# Altium PCB XXX — копия.PcbDoc (part 2 of 2)
Units mm, origin at the board's own origin, x right, y up, seen from the top; angles counter-clockwise.
Board outline 220 x 115 mm, 2 copper layers (Top Layer, Top, Bottom Layer, Bottom); 162 components, 124 nets, 635 pads, 86 vias.
Unrouted connection lines stored in the file: 138.
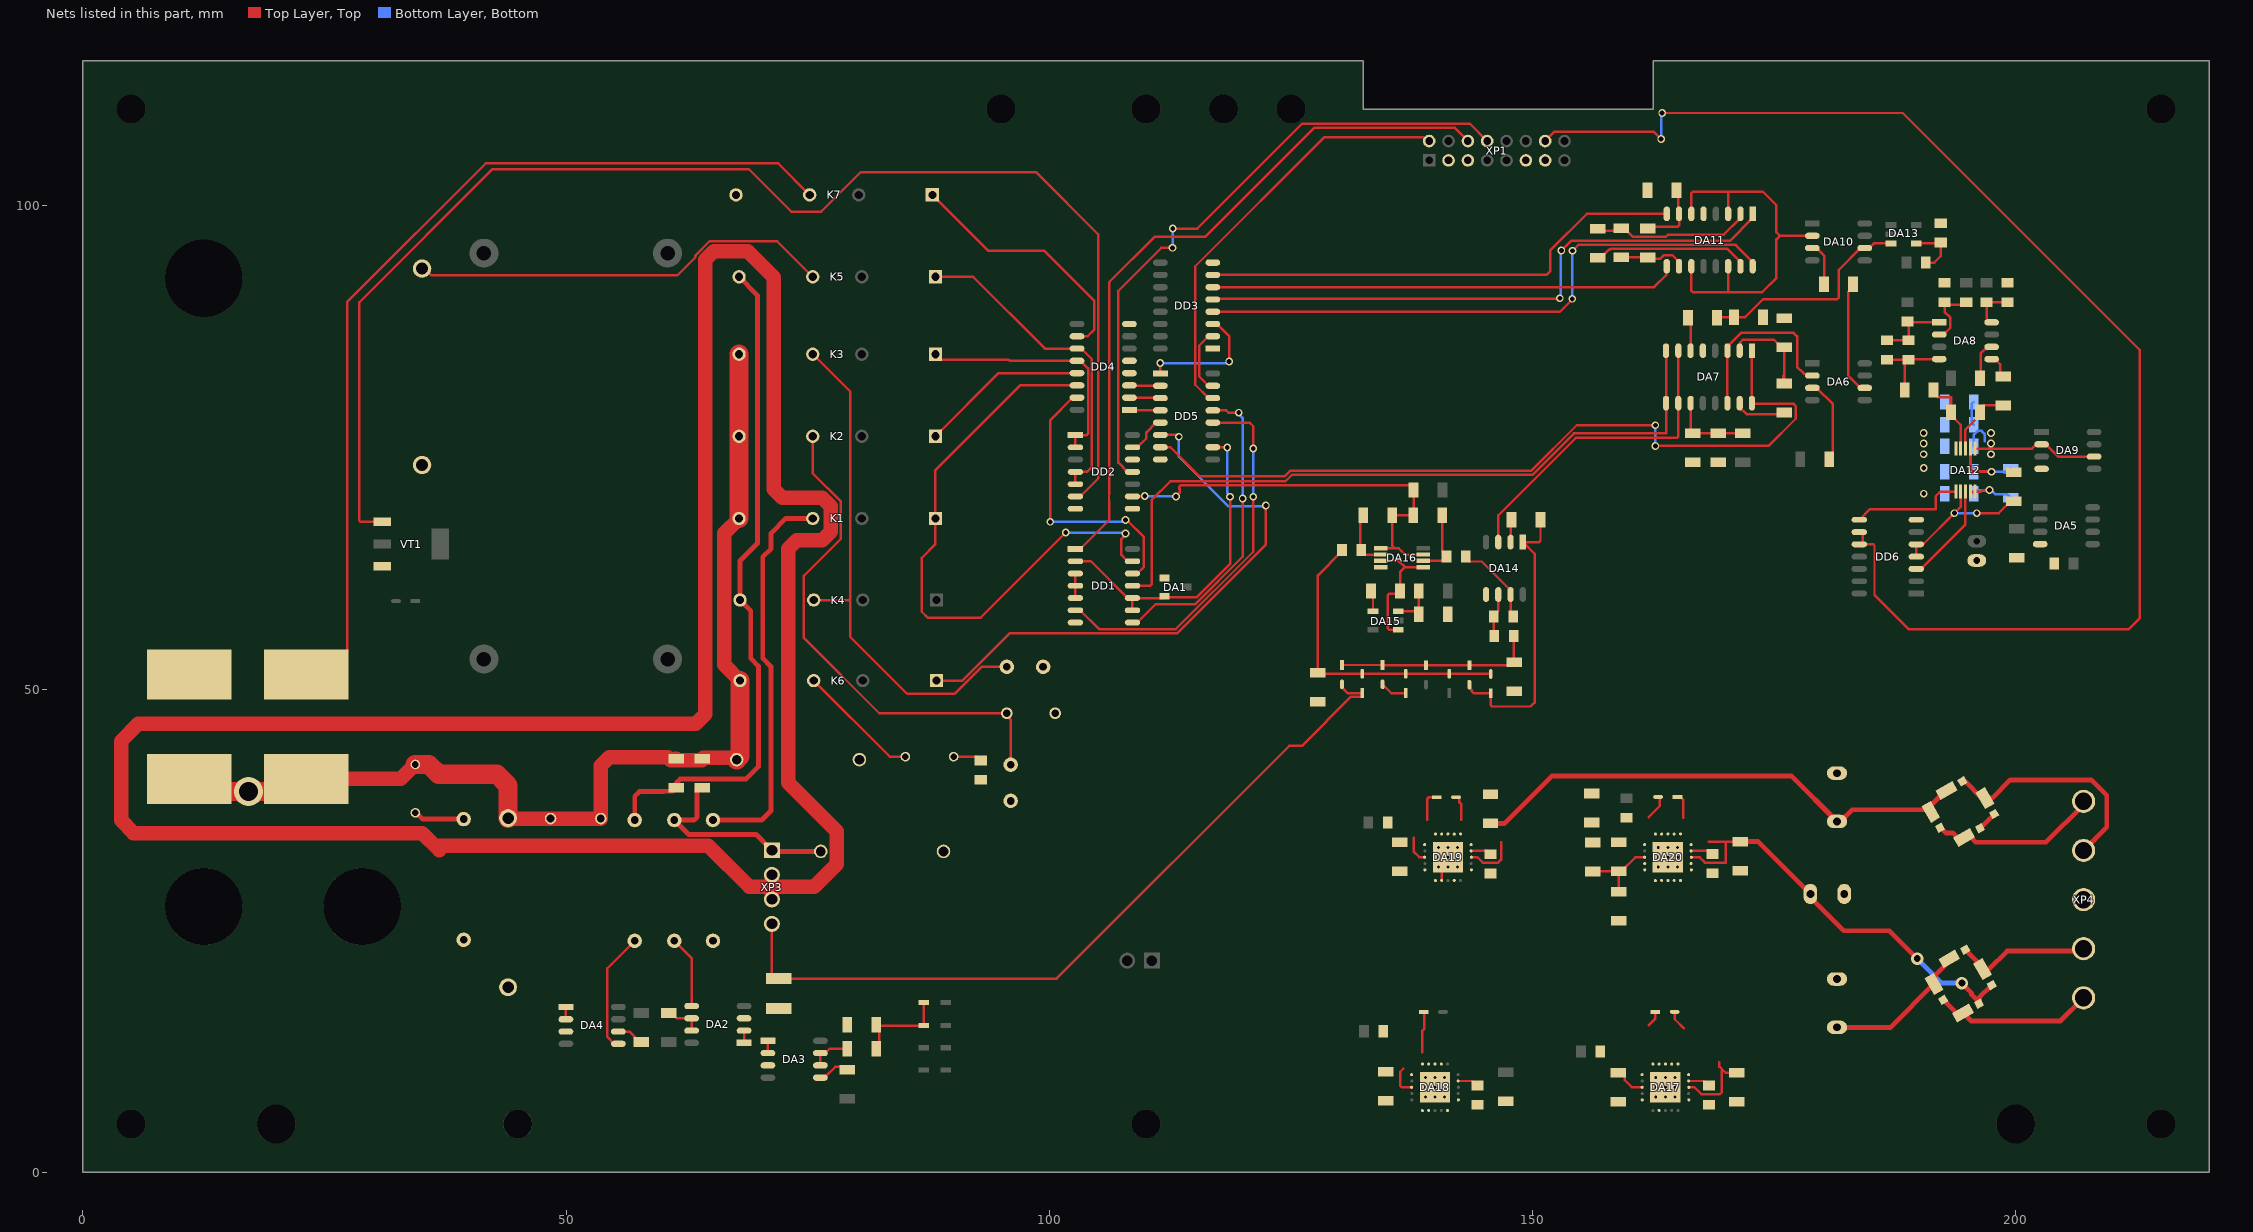
[diagram p2: the nets of this part, all layers, seen from the top]

## Via types
v1: diameter 0.8, hole 0.5, Top Layer, Top to Bottom Layer, Bottom, 48 vias
v2: diameter 0.6, hole 0.3, Top Layer, Top to Bottom Layer, Bottom, 36 vias
v3: diameter 1.27, hole 0.711, Top Layer, Top to Bottom Layer, Bottom, 2 vias

## Nets (pads, with @x,y where several pads share a name; then routed paths per layer and width w, separated by ;. In a path a pad name is that pad's centre, name@x,y a point inside that pad or via, vN(x,y) a via of type N, cw(c..) or ccw(c..) an arc to the next point about the centre after c; other vN are vias at no path point) (continued)
DAT_RgI: DD5.14 XP1.2 | length 44.5
  Top Layer, Top w0.254: DD5.14@116.912,80.105 116.475,80.105 115.1,81.479 115.1,93.742 128.458,107.1 138.628,107.1 139.028,106.7 XP1.2@139.3,106.7
DC1D1: DD3.2 DD5.15 | length 6.8
  Top Layer, Top w0.254: DD5.15@116.912,81.375 116.474,81.375 115.504,82.345 115.504,85.528 116.474,86.499 DD3.2@116.912,86.499
DC1D2: DD3.3 DD5.1 | length 13.1
  Top Layer, Top w0.254: v1(111.466,83.729) 111.488,83.707 DD5.1@111.488,82.645 ; DD3.3@116.912,87.768 117.349,87.768 118.6,86.518 v1(118.6,83.9)
  Bottom Layer, Bottom w0.254: v1(111.466,83.729) 118.429,83.729 v1(118.6,83.9)
DC2D1: DD4.1 DD5.4 | length 3.2
  Top Layer, Top w0.254: DD4.1@108.287,78.878 108.308,78.857 111.466,78.857 DD5.4@111.488,78.835
DC2D2: DD4.2 DD5.3 | length 3.2
  Top Layer, Top w0.254: DD4.2@108.287,80.148 108.308,80.127 111.466,80.127 DD5.3@111.488,80.105
DC2D3: DD4.3 DD5.2 | length 3.2
  Top Layer, Top w0.254: DD4.3@108.287,81.418 108.308,81.397 111.466,81.397 DD5.2@111.488,81.375
ENB_RgI: DD1.1 XP1.6 | length 73.7
  Top Layer, Top w0.254: DD1.1@102.7,64.497 103.2,64.497 106.2,67.497 106.2,69.43 106.173,69.457 106.173,70.143 106.2,70.17 106.2,74.806 106.183,74.823 106.183,77.426 106.2,77.443 106.2,92.1 110.914,96.814 116.157,96.814 127.424,108.081 141.919,108.081 XP1.6@143.3,106.7
GNDV: C1.1 C4.2 C5.1 C6.1 C7.2 C9.2 C10.2 C11.2 C13.1 C14.1 C15.2 C16.2 C17.2 C18.2 C19.1 C20.1 C21.1 C22.1 C23.1 C24.1 C25.1 C26.1 C27.1 C28.2 C29.1 C30.1 C32.1 DA1.1 DA2.3 DA3.3 DA4.3 DA5.4 DA7.5 DA8.6 DA9.4 DA11.5 DA12.5 DA14.5 DA16.4 DA17.5 DA17.7 DA17.11 DA17.17 DA17.18 DA17.19 DA17.21 DA18.6 DA18.7 DA18.10 DA18.11 DA18.17 DA18.18 DA18.19 DA18.21 DA19.5 DA19.6 DA19.7 DA19.9 DA19.11 DA19.17 DA19.18 DA19.19 DA19.21 DA20.4 DA20.5 DA20.6 DA20.7 DA20.8 DA20.9 DA20.10 DA20.11 DA20.12 DA20.17 DA20.18 DA20.19 DA20.21 DD1.7 DD2.7 DD3.1 DD3.8 DD4.4 DD4.5 DD4.8 DD5.8 DD6.7 FV1.1 FV2.1 K7.4 R1.1 R2.1 R5.1 R6.1 R7.1 R8.1 R9.1 R19.1 R22.1 R26.2 R27.1 R31.1 R37.1 R38.1 R42.1 R45.1 R47.2 R48.1 R57.1 VD19.2 VD21.2 VT1.3 XP1.3 XP1.5 XP1.11 XP1.13 XP4.3 | length 8.9
  Top Layer, Top w0.254: VT1.3@30.92,62.78 VT1.3@31,62.7 ; DA19.7@140.593,30.2 140.593,31.95 v2(141.243,32.6) ; C9.2@196.284,82.14 196.353,82.209 196.353,84.699 197.059,85.405 DA8.6@197.496,85.405 ; VD21.2@196.293,35.599 VD21.2@196.293,35.607 ; VD19.2@197.748,37.062 VD19.2@197.748,37.07
  Top Layer, Top w0.5: VD21.2@196.293,35.607 VD19.2@197.748,37.062
  other v1: 190.475,70.216 190.475,72.879 190.455,74.3 190.455,75.4 190.455,76.5
  other v2: 138.9,7.8 139.9,7.8 140.9,7.8 162.743,7.8 163.743,7.8 164.743,7.8 138.9,8.8 139.9,8.8 140.9,8.8 162.743,8.8 163.743,8.8 164.743,8.8 138.9,9.8 139.9,9.8 140.9,9.8 162.743,9.8 163.743,9.8 164.743,9.8 140.243,31.6 141.243,31.6 142.243,31.6 163,31.6 164,31.6 165,31.6 140.243,32.6 142.243,32.6 163,32.6 164,32.6 165,32.6 140.243,33.6 141.243,33.6 142.243,33.6 163,33.6 164,33.6 165,33.6
GRD: R18.2 VD8.1 VD13.2 XP3.2 XP3.3 | length 280.3
  Top Layer, Top w0.25: VD13.2@134.472,50.487 135.373,49.587 VD8.1@136.872,49.587
  Top Layer, Top w1.5: 5.2,35.1 5.29,35.1 ; 36.49,33.8 64.72,33.8 68.973,29.546 75.668,29.546 78,31.879 78,35.3 73,40.3 73,64.521 73.879,65.4 76.521,65.4 77.4,66.279 77.4,68.921 76.521,69.8 72.379,69.8 71.5,70.679 71.5,92.6 68.8,95.3 65.279,95.3 64.4,94.421 64.4,47.4 63.4,46.4 5.75,46.4 3.971,44.621 3.971,36.419 5.29,35.1 ; 36.9,33.321 35.121,35.1 5.29,35.1 ; XP3.3@71.3,28.24 XP3.2@71.3,30.78
I0: DD1.12 DD4.15 | length 29.3
  Top Layer, Top w0.254: v1(100.1,67.3) 100.1,77.823 102.425,80.148 DD4.15@102.863,80.148 ; v1(107.888,67.497) 108.003,67.497 109.781,65.719 109.781,62.638 109.1,61.957 DD1.12@108.6,61.957
  Bottom Layer, Bottom w0.254: v1(100.1,67.3) 107.543,67.3 107.74,67.497 v1(107.888,67.497)
K1: DD1.13 DD4.14 K1.1 | length 63
  Top Layer, Top w0.254: v1(101.7,66.2) 92.9,57.4 87.4,57.4 86.8,58 86.8,63.571 88.218,64.989 K1.1@88.218,67.65 88.218,72.663 96.973,81.419 DD4.14@103.513,81.419 ; v1(107.888,66.1) 107.888,65.952 107.419,65.483 107.419,63.908 108.1,63.227 DD1.13@108.6,63.227
  Bottom Layer, Bottom w0.254: v1(101.7,66.2) 101.75,66.15 107.838,66.15 v1(107.888,66.1)
K2: DD4.13 K2.1 | length 18
  Top Layer, Top w0.254: K2.1@88.218,76.15 94.757,82.688 DD4.13@103.513,82.688
K3: DD2.1 DD2.2 DD4.12 K3.1 | length 25.8
  Top Layer, Top w0.254: K3.1@88.218,84.65 88.782,84.086 95.773,84.086 95.901,83.958 DD4.12@102.863,83.958 103.233,83.958 104.006,83.185 104.006,76.427 103.857,76.279 DD2.1@102.7,76.279 DD2.2@102.7,75.009
K4: DD2.4 DD2.5 DD4.11 K5.1 | length 34
  Top Layer, Top w0.254: K5.1@88.218,92.65 92.127,92.65 99.548,85.229 DD4.11@102.863,85.229 103.3,85.229 104.41,84.118 104.41,72.998 103.881,72.469 DD2.4@102.7,72.469 DD2.5@102.7,71.199
K5: DD4.10 K7.1 | length 26.3
  Top Layer, Top w0.254: K7.1@87.9,101.128 93.671,95.358 99.45,95.358 104.657,90.15 104.657,87.205 103.951,86.498 DD4.10@102.863,86.498
KC: DD5.6 K6.1 | length 59.2
  Top Layer, Top w0.254: K6.1@88.317,50.878 91.007,50.878 95.921,55.792 113.251,55.792 122.4,64.941 v1(122.4,69) ; DD5.6@111.488,76.295 113.057,76.295 113.252,76.1 v1(113.4,76.1)
  Bottom Layer, Bottom w0.254: v1(113.4,76.1) 113.4,74.03 118.53,68.9 122.3,68.9 v1(122.4,69)
NetC1_2: C1.2 K2.3 R8.2 | length 53.4
  Top Layer, Top w0.254: K2.3@75.518,76.15 75.518,72.304 78.427,69.395 78.427,65.548 74.6,61.721 74.6,55.3 82.4,47.5 C1.2@95.6,47.5 95.6,47.244 96,46.844 R8.2@96,42.175
NetC2_1: C2.1 R2.2 | length 3
  Top Layer, Top w0.254: C2.1@90.1,43 91.767,43 91.794,42.973 92.527,42.973 R2.2@92.9,42.6
NetC2_2: C2.2 K6.3 | length 12.7
  Top Layer, Top w0.254: K6.3@75.617,50.878 83.496,43 C2.2@85.1,43
NetC3_1: C3.1 R6.2 | length 5.3
  Top Layer, Top w0.5: C3.1@34.4,37.2 34.535,37.2 35.185,36.55 R6.2@39.4,36.55
NetC3_2: C3.2 FV2.2 K1.4 K2.4 K3.4 K6.4 pad.0@17.146,39.4 pad.2 pad.3 R3.2 R4.2 R5.2 R10.1 R11.1 | length 112.9
  Top Layer, Top w1.5: R3.2@23.1,40.7 32.9,40.7 C3.2@34.4,42.2 ; R5.2@44,36.65 44.05,36.6 pad.2@48.4,36.6 pad.3@53.6,36.6 53.6,42.067 54.479,42.946 60.544,42.946 60.84,42.65 61.141,42.65 61.291,42.8 R10.1@61.391,42.8 ; R10.1@61.391,42.65 64.058,42.65 64.108,42.7 R11.1@64.108,42.8 64.208,42.9 FV2.2@67.65,42.9 ; K1.4@67.898,67.65 66.357,66.109 66.357,52.519 K6.4@67.997,50.878
  Top Layer, Top w2: R4.2@11,40.7 11,39.6 11.2,39.4 pad.0@17.146,39.4 21.8,39.4 R3.2@23.1,40.7 ; C3.2@34.4,42.2 35.8,42.2 36.8,41.2 42.828,41.2 44,40.028 R5.2@44,36.65 ; FV2.2@67.65,42.7 67.997,43.047 K6.4@67.997,50.878 ; K1.4@67.898,67.65 K2.4@67.898,76.15 K3.4@67.898,84.65
NetC7_1: C7.1 DA7.11 R21.1 R22.2 | length 8.4
  Top Layer, Top w0.254: DA7.11@166.343,79.583 166.343,76.706 C7.1@166.571,76.478 166.579,76.47 R21.1@171.729,76.47
NetC8_1: C8.1 DA8.1 R25.2 R29.1 | length 9.6
  Top Layer, Top w0.254: C8.1@186.684,86.08 R29.1@188.911,86.08 ; R25.2@188.784,88.02 189.017,88.02 188.911,87.914 R29.1@188.911,86.453 ; R29.1@188.884,86.08 R29.1@188.911,86.106 ; R25.2@189.017,87.945 DA8.1@192.072,87.945 ; R29.1@188.911,86.08 R29.1@189.284,86.453 ; R29.1@188.911,86.08 R29.1@189.284,86.453 ; R29.1@188.911,86.106 R29.1@188.911,86.453 ; R29.1@188.911,86.106 R29.1@188.911,86.453 ; R29.1@188.911,86.106 R29.1@188.911,86.453 ; R29.1@188.911,86.453 R29.1@189.284,86.453
NetC8_2: C8.2 DA8.4 R29.2 R33.1 | length 8.1
  Top Layer, Top w0.254: C8.2@186.684,84.08 188.484,84.08 R33.1@188.484,80.94 ; R29.2@188.939,84.135 DA8.4@192.072,84.135
NetC10_1: C10.1 C11.1 C15.1 DA9.2 DA9.6 DA12.1 | length 19.2
  Top Layer, Top w0.254: DA12.1@195.784,74.88 201.676,74.88 202.116,75.32 DA9.2@202.66,75.32 203.098,75.32 204.368,74.05 DA9.6@208.084,74.05
  Bottom Layer, Bottom w0.254: C10.1@195.634,75.105 195.634,75.124 195.634,76.305 196.032,76.702 196.459,76.702 196.759,76.402 196.759,75.628 ; C11.1@195.634,79.7 195.455,79.521 C15.1@195.455,77.506 ; C15.1@195.455,77.506 C15.1@195.634,77.327 C15.1@195.455,77.506
  other v1: 197.426,74.3 197.426,75.4 197.426,76.5
NetC13_2: C13.2 DA10.6 DA13.3 R39.2 | length 22.9
  Top Layer, Top w0.254: R39.2@169.078,88.4 169.153,88.474 C13.2@170.833,88.474 171.994,88.474 173.847,90.327 181.503,90.327 181.691,90.516 181.691,93.388 183.926,95.623 DA10.6@184.363,95.623 184.819,95.623 185.309,96.113 DA13.3@187.078,96.113
NetC14_2: C14.2 DA12.2 R40.1 | length 8.3
  Top Layer, Top w0.3: DA12.2@195.284,74.88 195.284,72.805 195.601,72.489 v1(197.475,72.489)
  Bottom Layer, Bottom w0.254: C14.2@195.634,72.489 v1(197.475,72.489) 199.144,72.489 R40.1@199.455,72.8
NetC16_1: C16.1 DA12.9 DA12.10 R40.2 | length 6.4
  Top Layer, Top w0.254: DA12.9@195.284,70.43 DA12.10@195.784,70.43 196.367,70.43 196.494,70.557 197.243,70.557 v1(197.275,70.589)
  Bottom Layer, Bottom w0.254: C16.1@195.655,70.2 195.655,70.216 196.028,70.589 v1(197.275,70.589) 197.423,70.589 197.838,70.173 199.082,70.173 R40.2@199.455,69.8
NetC17_1: C17.1 C19.2 DA17.13 DA17.15 DA17.16 VD14.1 VD16.1 VD22.2 | length 25.8
  Top Layer, Top w0.254: VD22.2@164.7,16.6 164.7,15.842 165.643,14.9 ; DA17.13@166.161,8.8 166.742,8.8 167.448,8.094 169.389,8.094 169.565,8.269 169.565,10.533 169.647,10.615 ; 169.332,11.385 169.332,10.93 169.647,10.615 ; C19.2@171.143,10.3 169.962,10.3 169.647,10.615
  Top Layer, Top w0.5: C17.1@181.493,15 187.033,15 VD14.1@191.524,19.491 191.521,19.493 191.521,20.257 193.112,21.847 VD16.1@193.112,21.972
NetC18_1: C18.1 C21.2 DA19.13 DA19.15 DA19.16 VD18.1 VD20.1 VD24.2 | length 60.8
  Top Layer, Top w0.254: VD24.2@142.068,38.817 142.337,38.817 142.401,38.753 142.401,38.319 142.608,38.113 142.608,36.452 ; DA19.13@143.661,32.6 144.294,32.6 144.86,32.034 146.426,32.034 146.743,32.351 146.743,34.175 ; VD20.1@191.101,37.518 191.326,37.293 191.326,37.518 VD20.1@191.326,38.105 ; VD18.1@192.724,39.503 VD18.1@192.818,39.503
  Top Layer, Top w0.5: C21.2@145.643,36.1 147.1,36.1 152,41 176.793,41 C18.1@181.493,36.3 ; C18.1@181.843,36.3 183.061,37.518 VD20.1@191.101,37.518 ; VD20.1@191.326,38.105 VD18.1@192.724,39.503
NetC22_2: C22.2 DA17.14 | length 2.3
  Top Layer, Top w0.254: DA17.14@166.143,9.45 167.669,9.45 168.118,9.002 C22.2@168.243,9.002
NetC23_2: C23.2 DA18.14 | length 2.2
  Top Layer, Top w0.254: DA18.14@142.3,9.45 143.7,9.45 144.175,8.975 C23.2@144.3,8.975
NetC24_2: C24.2 DA19.14 | length 2.1
  Top Layer, Top w0.254: DA19.14@143.643,33.25 145.308,33.25 C24.2@145.643,32.915
NetC25_2: C25.2 DA17.1 DA17.3 DA17.20 NT1.1 VD22.1 | length 4.9
  Top Layer, Top w0.254: C25.2@158.86,10.3 159.16,10.3 159.533,9.927 159.533,9.544 160.277,8.8 DA17.3@161.325,8.8 ; 162.038,15.238 162.7,15.899 VD22.1@162.7,16.6
NetC26_2: C26.2 DA18.1 DA18.3 DA18.20 NT2.1 VD23.1 | length 7.4
  Top Layer, Top w0.254: 136.613,10.713 136.3,10.4 136.3,8.949 136.449,8.8 DA18.3@137.482,8.8 ; 138.6,12.4 138.6,14.648 138.776,14.824 138.776,16.531 138.725,16.582 VD23.1@138.725,16.6
NetC27_2: C27.2 DA19.1 DA19.3 DA19.20 NT3.1 VD24.1 | length 6.1
  Top Layer, Top w0.254: 137.68,34.64 137.68,33.199 138.279,32.6 DA19.3@138.825,32.6 ; 139.117,36.452 139.117,38.668 139.266,38.817 VD24.1@140.067,38.817
NetC28_1: C28.1 C29.2 DA20.13 DA20.15 DA20.16 VD15.2 VD17.2 VD25.1 | length 45.5
  Top Layer, Top w0.254: VD25.1@164.983,38.836 165.289,38.836 165.575,38.55 165.575,36.7 ; DA20.13@166.418,32.6 167.269,32.6 167.817,32.052 169.971,32.052 169.971,34.211 ; 168.215,34.211 169.971,34.211 ; C29.2@171.2,34.211 169.971,34.211 ; C28.1@178.173,29.369 178.213,29.369 178.743,28.84 C28.1@178.743,28.8
  Top Layer, Top w0.5: C29.2@171.5,34.211 173.331,34.211 C28.1@178.173,29.369 ; C28.1@178.743,28.464 182.207,25 186.91,25 v3(189.8,22.11) ; v3(194.411,19.572) 195.4,18.584 195.4,18.411 196.18,17.631 VD15.2@196.18,17.438 ; VD15.2@196.18,17.621 196.223,17.663 196.223,18.092 VD17.2@197.503,19.372
  Bottom Layer, Bottom w0.5: v3(189.8,22.11) 192.338,19.572 v3(194.411,19.572)
NetC30_2: C30.2 DA20.14 | length 2.3
  Top Layer, Top w0.254: DA20.14@166.4,33.25 168.283,33.25 C30.2@168.6,32.933
NetC31_1: C31.1 DA20.3 R56.1 R57.2 | length 8.1
  Top Layer, Top w0.254: C31.1@156.2,31.125 156.21,31.135 158.875,31.135 R56.1@158.9,31.16 ; R57.2@158.9,29.025 R56.1@158.9,31.16 ; DA20.3@161.582,32.6 160.64,32.6 159.2,31.16 R56.1@158.9,31.16
NetC31_2: C31.2 C32.2 DA20.1 DA20.20 NT4.1 R56.2 VD25.2 | length 2.7
  Top Layer, Top w0.254: 162,36.742 163.156,37.899 163.156,38.836 VD25.2@162.982,38.836
NetDA1_2: DA1.2 DD1.2 DD1.9 DD1.10 DD5.10 | length 34.1
  Top Layer, Top w0.254: DD1.2@102.7,63.227 104.29,63.227 108.1,59.417 DD1.10@108.6,59.417 ; DD1.9@108.6,58.147 DD1.10@108.6,59.417 ; DD5.10@116.912,75.025 116.925,75.012 118.388,75.012 v1(118.4,75) ; v1(118.7,69.9) 118.7,62.955 115.264,59.519 111.981,59.519 DA1.2@111.9,59.6 111.682,59.382 109.235,59.382 109.2,59.417 DD1.10@108.6,59.417
  Bottom Layer, Bottom w0.254: v1(118.4,75) 118.4,70.348 118.7,70.048 v1(118.7,69.9)
NetDA2_1: DA2.1 DA2.2 | length 1.3
  Top Layer, Top w0.254: DA2.1@68.412,13.395 DA2.2@68.412,14.665
NetDA2_5: DA2.5 R12.1 | length 7.5
  Top Layer, Top w0.254: R12.1@61.2,23.95 62.988,22.162 DA2.5@62.988,17.205
NetDA2_6: DA2.6 DA2.7 R16.1 | length 3.9
  Top Layer, Top w0.254: R16.1@60.6,16.49 60.9,16.49 61.455,15.935 DA2.6@62.988,15.935 DA2.7@62.988,14.665
NetDA3_1: DA3.1 DA3.2 | length 1.3
  Top Layer, Top w0.254: DA3.2@70.888,12.335 DA3.1@70.888,13.605
NetDA3_5: DA3.5 R15.2 | length 3.4
  Top Layer, Top w0.254: DA3.5@76.312,9.795 76.749,9.795 77.855,10.9 78.796,10.9 R15.2@79.096,10.6
NetDA3_6: DA3.6 DA3.7 R17.1 | length 4.2
  Top Layer, Top w0.254: DA3.6@76.312,11.065 DA3.7@76.312,12.335 76.808,12.335 77.278,12.805 R17.1@79.096,12.805
NetDA4_1: DA4.1 DA4.2 | length 1.3
  Top Layer, Top w0.254: DA4.2@49.988,15.835 DA4.1@49.988,17.105
NetDA4_5: DA4.5 R14.1 | length 12.6
  Top Layer, Top w0.254: DA4.5@55.412,13.295 54.975,13.295 54.268,14.001 54.268,21.118 R14.1@57.1,23.95
NetDA4_6: DA4.6 R13.1 | length 2.9
  Top Layer, Top w0.254: DA4.6@55.412,14.565 56.556,14.565 57.127,13.994 57.127,13.863 57.5,13.49 R13.1@57.8,13.49
NetDA6_2: DA6.2 DA7.3 DA7.14 | length 18.5
  Top Layer, Top w0.254: DA7.14@170.153,79.583 DA7.3@170.153,84.569 ; DA7.3@170.153,85.007 170.153,85.444 171.559,86.85 177.006,86.85 177.364,86.493 177.364,83.336 178.07,82.63 178.195,82.63 178.395,82.43 DA6.2@178.939,82.43
NetDA6_3: DA6.3 R20.2 | length 8.6
  Top Layer, Top w0.254: DA6.3@178.939,81.16 179.377,81.16 181.064,79.473 181.064,74.164 R20.2@180.7,73.8
NetDA6_6: DA6.6 R28.1 | length 11.9
  Top Layer, Top w0.254: R28.1@183.151,91.9 183.151,91.6 182.678,91.127 182.678,82.407 183.926,81.16 DA6.6@184.363,81.16
NetDA7_2: DA7.2 R30.1 R31.2 | length 10.7
  Top Layer, Top w0.254: DA7.2@171.423,85.007 171.478,85.062 171.478,85.88 171.748,86.15 174.948,86.15 175.748,85.35 R31.2@176.048,85.35 176.048,82.415 176.048,82.295 ; 176.048,82.295 176.048,81.74 R30.1@176.048,81.62 175.928,81.74 175.928,82.295 175.928,82.415 176.048,82.295
NetDA7_15: DA7.15 R30.2 | length 5.4
  Top Layer, Top w0.254: DA7.15@171.423,79.583 171.423,79.145 172.129,78.439 175.868,78.439 R30.2@176.048,78.62
NetDA8_2: DA8.2 R23.2 R26.1 | length 6.2
  Top Layer, Top w0.254: DA8.2@192.072,86.675 192.51,86.675 193.216,87.381 193.216,88.428 192.618,89.025 R26.1@192.618,90.02 192.858,89.78 R23.2@194.355,89.78
NetDA8_5: DA8.5 R32.1 | length 2.5
  Top Layer, Top w0.254: DA8.5@197.496,84.135 197.836,84.135 198.384,83.587 198.384,82.64 R32.1@198.684,82.34
NetDA8_8: DA8.8 R24.2 R27.2 | length 4.5
  Top Layer, Top w0.254: R24.2@196.968,90.02 196.968,88.143 197.166,87.945 DA8.8@197.496,87.945 ; R24.2@197.181,90.02 R27.2@199.147,90.02
NetDA10_2: DA10.2 DA11.3 DA11.6 DA11.11 DA11.14 | length 39.8
  Top Layer, Top w0.254: DA11.11@166.419,93.746 166.424,93.741 166.424,91.207 166.573,91.058 170.144,91.058 ; DA11.6@166.419,99.17 166.419,101.309 166.568,101.458 170.229,101.458 ; DA11.14@170.229,93.746 170.229,91.143 170.144,91.058 ; DA11.3@170.229,99.17 170.229,101.458 ; DA10.2@178.939,96.893 175.589,96.893 ; 170.144,91.058 173.736,91.058 175.224,92.546 175.224,96.528 175.589,96.893 ; 170.229,101.458 173.824,101.458 175.224,100.058 175.224,97.258 175.589,96.893
NetDA10_3: DA10.3 R28.2 | length 4.5
  Top Layer, Top w0.254: DA10.3@178.939,95.623 179.377,95.623 180.151,94.848 R28.2@180.151,91.9
NetDA11_2: DA11.2 R34.1 R35.2 | length 16.9
  Top Layer, Top w0.254: R34.1@156.756,97.633 156.987,97.401 R35.2@158.93,97.401 ; DA11.2@171.499,99.17 171.499,98.732 169.767,97 163.988,97 163.765,96.777 160.38,96.777 159.493,97.664 R35.2@159.193,97.664 ; R35.2@158.93,97.401 R35.2@159.193,97.664 ; R35.2@158.93,97.401 R35.2@159.193,97.664
NetDA11_7: DA11.7 R36.1 R37.2 | length 7
  Top Layer, Top w0.254: R36.1@162.072,97.51 162.402,97.84 165,97.84 165.149,97.989 DA11.7@165.149,99.17 165.073,99.246 165.073,99.949 165.068,99.954 165.068,101.321 164.956,101.433 164.878,101.51 R37.2@164.878,101.6
NetDA11_10: DA11.10 R35.1 R36.2 | length 6.9
  Top Layer, Top w0.254: R35.1@159.193,94.664 159.199,94.658 R36.2@161.924,94.658 162.047,94.535 163.232,94.535 163.587,94.889 164.443,94.889 165.149,94.183 DA11.10@165.149,93.746
NetDA11_15: DA11.15 R34.2 | length 16.1
  Top Layer, Top w0.254: R34.2@156.756,94.633 157.056,94.633 157.862,95.439 157.968,95.439 158.074,95.545 165.526,95.545 165.532,95.539 170.144,95.539 171.499,94.183 DA11.15@171.499,93.746
NetDA12_6: DA12.6 DD6.8 | length 12
  Top Layer, Top w0.254: DD6.8@183.8,67.51 184.906,68.616 191.702,68.616 191.702,69.947 192.161,70.407 193.761,70.407 DA12.6@193.784,70.43
NetDA12_7: DA12.7 DD6.4 DD6.5 R42.2 | length 15.7
  Top Layer, Top w0.254: DD6.4@189.7,63.7 DD6.5@189.7,64.97 189.766,65.036 190.471,65.036 v1(193.634,68.2) ; v1@193.65,68.2 194.284,68.834 DA12.7@194.284,70.43 ; v1(195.955,68.2) 198.225,68.2 199.455,69.43 R42.2@199.755,69.43
  Bottom Layer, Bottom w0.254: v1(193.634,68.2) v1(195.955,68.2)
NetDA12_8: DA12.8 DD6.3 | length 10.4
  Top Layer, Top w0.254: DD6.3@189.7,62.43 190.2,62.43 194.784,67.014 DA12.8@194.784,70.43
NetDA13_4: DA13.4 R38.2 R41.1 | length 5.7
  Top Layer, Top w0.254: DA13.4@189.678,96.113 192.225,96.113 192.225,94.789 191.559,94.123 R41.1@190.678,94.123
NetDA14_1: DA14.1 R43.2 VD9.1 VD10.2 | length 29.9
  Top Layer, Top w0.254: VD10.2@143.461,50.454 143.461,50.11 143.716,49.855 143.716,49.766 143.896,49.587 145.628,49.587 VD9.1@145.661,49.554 145.661,48.345 145.809,48.196 149.796,48.196 150.2,48.6 150.2,63.994 DA14.1@148.989,65.205 150.665,65.205 150.814,65.354 R43.2@150.814,67.495
NetDA14_2: DA14.2 R43.1 | length 2.3
  Top Layer, Top w0.254: DA14.2@147.719,65.205 147.719,67.265 147.719,67.4 R43.1@147.814,67.495
NetDA14_6: DA14.6 R49.2 R50.1 | length 4.5
  Top Layer, Top w0.254: R49.2@146.044,55.488 145.984,55.548 145.984,57.618 146.449,58.083 DA14.6@146.449,59.781
NetDA14_7: DA14.7 R50.2 R52.1 | length 8.9
  Top Layer, Top w0.254: R52.1@143.084,63.693 143.084,63.568 143.457,63.195 144.742,63.195 147.719,60.219 DA14.7@147.719,59.781 R50.2@147.719,57.493
NetDA15_3: DA15.3 R44.1 R45.2 | length 4.9
  Top Layer, Top w0.254: DA15.3@136.084,58.043 137.034,58.043 R45.2@138.584,58.043 ; R45.2@138.232,57.743 R44.1@138.232,60.146
NetDA15_4: DA15.4 R46.1 | length 2.3
  Top Layer, Top w0.254: R46.1@133.284,60.146 133.484,60.146 DA15.4@133.484,58.043
NetDA16_2: DA16.2 R51.2 R53.1 | length 6
  Top Layer, Top w0.254: R53.1@132.484,67.993 132.184,67.693 132.184,64.493 R51.2@132.284,64.393 132.284,64.291 132.657,63.918 DA16.2@134.284,63.918
NetDA16_6: DA16.6 R52.2 R54.1 | length 6.5
  Top Layer, Top w0.254: DA16.6@138.684,63.268 R52.2@140.732,63.268 ; R54.1@140.659,67.993 140.659,64.243 141.084,63.818 R52.2@141.084,63.693
NetDD1_3: DD1.3 DD1.4 DD1.5 | length 2.5
  Top Layer, Top w0.254: DD1.5@102.7,59.417 DD1.3@102.7,61.957
NetDD1_6: DD1.6 DD5.12 | length 39.8
  Top Layer, Top w0.254: DD1.6@102.7,58.147 103.2,58.147 105.151,56.196 113.084,56.196 121.1,64.212 v1(121.1,69.9) ; DD5.12@116.912,77.565 120.721,77.565 121.1,77.186 v1(121.1,74.9)
  Bottom Layer, Bottom w0.254: v1(121.1,69.9) v1(121.1,74.9)
NetDD1_8: DD1.8 DD5.13 | length 32.1
  Top Layer, Top w0.254: DD1.8@108.6,56.877 109.1,56.877 111.01,58.788 115.104,58.788 120,63.683 v1(120,69.727) ; DD5.13@116.912,78.835 118.285,78.835 118.52,78.6 v1(119.6,78.6)
  Bottom Layer, Bottom w0.254: v1(119.6,78.6) 119.6,78.452 120,78.052 v1(120,69.727)
NetDD2_6: DD2.6 VT1.1 | length 141.8
  Top Layer, Top w0.254: VT1.1@31,67.3 28.749,67.3 28.6,67.449 28.6,90 42.4,103.8 68.9,103.8 73.3,99.4 76.4,99.4 80.49,103.49 98.61,103.49 105.061,97.039 105.061,71.79 103.2,69.929 DD2.6@102.7,69.929
NetDD2_8: DD2.8 DD2.12
NetFV1_2: FV1.2 R11.2 R12.2 XP3.1 | length 22.4
  Top Layer, Top w0.5: R11.2@64.108,39.8 63.808,39.8 63.558,39.55 63.558,36.743 63.265,36.45 R12.2@61.2,36.45 62.7,34.95 69.67,34.95 XP3.1@71.3,33.32 71.42,33.2 FV1.2@76.35,33.2
NetK1_3: K1.3 R7.2 | length 40.7
  Top Layer, Top w0.5: R7.2@65.2,36.45 70.223,36.45 71.2,37.427 71.2,40.627 71.204,40.63 71.204,43.147 71.2,43.151 71.2,52.319 70.35,53.169 70.35,63.676 71.209,64.535 71.209,66.109 72.75,67.65 K1.3@75.518,67.65
NetK3_3: K3.3 K4.3 R9.2 | length 54.5
  Top Layer, Top w0.254: K3.3@75.518,84.65 79.4,80.768 79.4,59.36 ; K4.3@75.617,59.211 79.251,59.211 79.4,59.36 ; R9.2@95.6,52.3 93,52.3 90.2,49.5 85.3,49.5 79.4,55.4 79.4,59.36
NetK4_4: K4.4 K5.4 R10.2 R14.2 | length 69.8
  Top Layer, Top w0.5: R14.2@57.1,36.45 57.1,38.9 57.6,39.4 60.083,39.4 60.11,39.427 61.018,39.427 R10.2@61.391,39.8 61.391,40.281 61.791,40.681 68.605,40.681 69.9,41.976 69.9,52.369 69.1,53.169 69.1,58.108 K4.4@67.997,59.211 67.997,63.259 69.8,65.061 69.8,90.748 K5.4@67.898,92.65
NetK5_3: K5.3 R1.2 | length 43.8
  Top Layer, Top w0.254: R1.2@35.1,93.5 35.374,93.5 36.074,92.8 61.5,92.8 63.373,94.673 63.373,94.847 64.853,96.327 71.841,96.327 K5.3@75.518,92.65
NetK7_3: K7.3 R3.1 R4.1 | length 96.5
  Top Layer, Top w0.254: R3.1@23.1,51.5 24.875,51.5 27.348,53.973 27.348,90.048 41.7,104.4 71.928,104.4 K7.3@75.2,101.128
NetR17_2: R17.2 R18.1 VD4.1 VD5.2 | length 10.1
  Top Layer, Top w0.25: R17.2@82.096,12.805 82.396,13.105 82.396,14.977 R18.1@82.096,15.277
  Top Layer, Top w0.254: R18.1@82.096,15.277 82.186,15.187 VD5.2@87.024,15.187 VD4.1@87.024,17.575
NetR47_1: R47.1 R51.1 VD6.2 VD7.2 VD8.2 VD9.2 | length 31.6
  Top Layer, Top w0.254: R51.1@130.284,64.393 130.284,64.268 127.776,61.761 R47.1@127.776,51.693 127.882,51.587 VD6.2@132.372,51.587 135.066,51.587 VD8.2@136.872,51.587 ; VD8.2@136.936,51.587 138.608,51.587 138.618,51.577 141.363,51.577 141.369,51.571 145.645,51.571 VD9.2@145.661,51.555
NetR48_2: R48.2 R49.1 VD10.1 VD11.1 VD12.1 VD13.1 | length 19.8
  Top Layer, Top w0.254: VD11.1@130.272,52.488 VD13.1@134.472,52.488 134.488,52.471 143.085,52.471 143.095,52.461 145.423,52.461 145.433,52.471 R48.2@147.38,52.471 ; R49.1@148.044,55.488 148.044,52.813 R48.2@148.076,52.781
NetVD14_2: VD14.2 VD15.1 XP4.1 | length 16.4
  Top Layer, Top w0.5: VD14.2@192.474,17.846 193.831,16.488 VD15.1@194.534,16.488 195.362,15.66 204.6,15.66 XP4.1@207,18.06
NetVD16_2: VD16.2 VD17.1 XP4.2 | length 14.1
  Top Layer, Top w0.5: VD16.2@194.757,23.036 196.553,21.24 VD17.1@196.553,21.018 197.209,21.018 199.084,22.893 206.753,22.893 XP4.2@207,23.14
NetVD18_2: VD18.2 VD19.1 XP4.4 | length 23.8
  Top Layer, Top w0.5: VD18.2@194.463,40.453 194.75,40.453 196.488,38.715 VD19.1@196.798,38.715 197.545,38.715 199.43,40.6 207.8,40.6 209.4,39 209.4,35.7 XP4.4@207,33.3
NetVD20_2: VD20.2 VD21.1 XP4.5 | length 17.4
  Top Layer, Top w0.5: VD20.2@192.15,35.647 192.213,35.647 192.739,35.121 193.463,35.121 193.935,34.649 195.331,34.649 195.831,34.149 203.102,34.149 207,38.047 XP4.5@207,38.38
OVLI: DA16.1 DA16.7 DD2.9 R53.2 R54.2 R55.2 | length 43.3
  Top Layer, Top w0.254: DD2.9@108.6,69.929 108.623,69.952 109.848,69.952 v1(109.871,69.974) ; v1(113.1,69.929) 113.1,69.95 113.5,70.35 113.5,70.7 113.459,70.741 113.459,70.951 113.608,71.1 137.311,71.1 137.684,70.727 137.684,68.018 R54.2@137.659,67.993 R53.2@135.484,67.993 135.484,64.816 135.731,64.568 ; DA16.1@134.284,64.568 135.731,64.568 ; DA16.7@138.684,63.918 136.787,63.918 136.462,64.243 136.137,64.568 135.731,64.568
  Bottom Layer, Bottom w0.254: v1(109.871,69.974) 109.894,69.952 113.077,69.952 v1(113.1,69.929)
OVLI,1: DD2.11 XP1.8 | length 66.8
  Top Layer, Top w0.254: DD2.11@108.6,72.469 108.1,72.469 107.143,73.426 107.143,91.209 111.582,95.648 v1(112.752,95.648) ; v1(112.769,97.641) 115.301,97.641 126.145,108.485 143.515,108.485 XP1.8@145.3,106.7
  Bottom Layer, Bottom w0.254: v1(112.752,95.648) 112.752,95.752 112.769,95.769 v1(112.769,97.641)
RUN_ADI: DD6.9 DD6.10 XP1.14 | length 140.6
  Top Layer, Top w0.254: XP1.14@151.3,106.7 152.277,107.677 162.523,107.677 v1(163.3,106.9) ; v1(163.4,109.6) 188.3,109.6 212.8,85.1 212.8,57.3 211.7,56.2 188.9,56.2 185.37,59.73 185.37,64.821 185.221,64.97 DD6.10@184.173,64.97 ; DD6.10@183.8,64.97 DD6.10@184.173,64.97 ; DD6.9@183.8,66.24 184.013,66.24 184.173,66.08 DD6.10@184.173,64.97 ; DD6.10@184.173,64.79 DD6.10@184.173,64.97
  Bottom Layer, Bottom w0.254: v1(163.3,106.9) 163.3,109.5 v1(163.4,109.6)
U0: DA7.7 DA7.10 DA14.3 | length 33.6
  Top Layer, Top w0.254: DA14.3@146.449,65.205 146.449,67.969 154.458,75.978 164.925,75.978 165.073,76.127 DA7.10@165.073,79.583 DA7.7@165.073,85.007
Uc: R19.2 VD6.1 VD11.2 XP3.4 | length 81.6
  Top Layer, Top w0.254: XP3.4@71.3,25.7 71.3,20.473 71.723,20.05 R19.2@72,20.05 100.75,20.05 124.826,44.126 126.124,44.126 131.209,49.211 132.303,49.211 132.372,49.28 VD6.1@132.372,49.587 130.866,49.587 130.272,50.181 VD11.2@130.272,50.554
unOVLI,1: DD2.13 DD5.5 | length 3.9
  Top Layer, Top w0.254: DD2.13@108.6,75.009 108.616,75.025 109.116,75.025 110.044,75.952 110.044,76.558 DD5.5@111.05,77.565
VLim: DA7.6 R39.1 | length 3.5
  Top Layer, Top w0.254: R39.1@166.078,88.4 166.078,88.365 166.343,88.1 DA7.6@166.343,85.007
Von: C12.2 DA12.3 R32.2 | length 7.2
  Top Layer, Top w0.254: DA12.3@194.784,74.88 194.784,76.84 196.284,78.34 C12.2@196.284,78.64 196.284,78.94 196.684,79.34 R32.2@198.684,79.34
Vop: C12.1 DA12.4 R33.2 | length 8.1
  Top Layer, Top w0.254: R33.2@191.484,80.94 191.484,80.64 191.911,80.213 193.311,80.213 193.311,79.567 193.284,79.54 C12.1@193.284,78.64 193.284,78.34 194.284,77.34 DA12.4@194.284,74.88
VREF_COMP: DA15.1 DA16.3 DA16.5 R46.2 | length 13.4
  Top Layer, Top w0.254: DA16.3@134.284,63.268 136.137,63.268 136.787,62.618 ; DA15.1@136.084,56.143 135.153,56.143 135.004,56.292 135.004,59.698 135.153,59.846 135.984,59.846 R46.2@136.284,60.146 136.284,62.115 136.787,62.618 ; DA16.5@138.684,62.618 136.787,62.618
X1: DA11.16 DD3.4 | length 62.8
  Top Layer, Top w0.254: DD3.4@116.912,89.039 152.817,89.039 154.1,90.322 v1(154.1,90.369) ; v1(154.121,95.35) 154.72,95.949 171.004,95.949 172.769,94.183 DA11.16@172.769,93.746
  Bottom Layer, Bottom w0.254: v1(154.1,90.369) 154.11,90.379 154.11,95.339 v1(154.121,95.35)
X2: DA11.1 DD3.5 | length 63
  Top Layer, Top w0.254: DD3.5@116.474,90.309 116.534,90.369 152.757,90.369 v1(152.817,90.429) ; v1(152.972,95.37) 153.975,96.373 170.41,96.373 172.769,98.732 DA11.1@172.769,99.17
  Bottom Layer, Bottom w0.254: v1(152.817,90.429) 152.894,90.506 152.894,95.293 v1(152.972,95.37)
X4: DA11.9 DD3.6 | length 48.4
  Top Layer, Top w0.254: DD3.6@116.912,91.578 162.575,91.578 163.803,92.807 163.803,93.67 DA11.9@163.879,93.746
X8: DA11.8 DD3.7 | length 50.9
  Top Layer, Top w0.254: DD3.7@116.912,92.849 151.449,92.849 151.803,93.203 151.803,95.37 155.602,99.17 DA11.8@163.879,99.17
X10: DA7.1 DA7.16 DD5.7 | length 83.9
  Top Layer, Top w0.254: DD5.7@111.488,75.025 112.512,75.025 115.537,72 124.346,72 124.915,72.568 149.832,72.568 154.564,77.3 v1(162.7,77.3) ; v1(162.7,75.151) 174.418,75.151 177.229,77.962 177.229,79.278 177.006,79.501 172.775,79.501 DA7.16@172.693,79.583 DA7.1@172.693,85.007
  Bottom Layer, Bottom w0.254: v1(162.7,75.151) v1(162.7,77.3)
нА: DA7.8 DA7.9 DD1.11 | length 75.4
  Top Layer, Top w0.254: DD1.11@108.6,60.687 110.438,60.687 110.587,60.836 110.587,69.56 112.527,71.5 112.929,71.5 112.933,71.504 124.422,71.504 125.082,72.164 149.999,72.164 154.279,76.444 163.803,76.444 DA7.9@163.803,79.583 DA7.8@163.803,85.007
pads on no net: DA5.1 DA5.3 DA5.5 DA5.7 DA5.8 DA6.1 DA6.5 DA6.8 DA8.7 DA9.1 DA9.5 DA9.8 DA10.1 DA10.5 DA10.8 DA13. DA15. DA17.2 DA17.4 DA17.6 DA17.8 DA17.9 DA17.10 DA17.12 DA18.2 DA18.4 DA18.5 DA18.8 DA18.9 DA18.12 DA19.2 DA19.4 DA19.8 DA19.10 DA19.12 DD1. DD2. DD3.9 DD3.10 DD3.11 DD3.12 DD3.13 DD3.14 DD4.7 DD4.9 DD5.9 DD6. DD6.11 DD6.12 DD6.13 K8.17 K8.18 K8.19 K8.20 XP1.16 XT1.0 XT2.0 XT3.0

## Keep-outs
Keep-Out Layer, Board:
  lines w0.127: 0,0 220,0 220,115 162.5,115 162.5,110 132.5,110 132.5,115 0,115 0,0
  lines w0.5: 0,0 220,0 220,115 162.5,115 162.5,110 132.5,110 132.5,115 0,115 0,0

## Other copper
Top Layer, Top:
  rectangle net NetC3_2: 14.898,38.1 19.956,43.3
  rectangle net NetK7_3: 15.091,48.9 19.012,54.1
  rectangle net GNDV: 140.418,33.917 142.068,37
  rectangle net GNDV: 139.185,31.125 139.943,31.475
  region net GNDV: 142.068,30.56 142.068,31.317 141.718,31.317 141.718,30.56
  region net GNDV: 143.318,31.475 142.56,31.475 142.56,31.125 143.318,31.125
  region net GNDV: 140.118,30.542 140.118,31.3 139.768,31.3 139.768,30.542
  rectangle net GNDV: 163.175,33.917 164.825,37
  region net GNDV: 138.775,6.725 138.775,7.483 138.425,7.483 138.425,6.725
  rectangle net GNDV: 162.918,10.117 164.568,13.2
  rectangle net GNDV: 139.075,10.117 140.725,13.2
  rectangle net GNDV: 161.668,7.325 162.425,7.675
  region net GNDV: 165.818,7.675 165.06,7.675 165.06,7.325 165.818,7.325
  rectangle net GNDV: 141.217,7.325 141.975,7.675
  rectangle net NetC10_1: 195.634,73.8 198.1,77.1
  region net NetC28_1: 173.1,33.725 173.1,37.1 165.125,37.1 165.125,34.517 165.117,34.509 165.126,34.5 165.9,34.5 165.9,33.865 166.04,33.725
  region net NetC25_2: 156.5,9.925 156.5,15.4 162.618,15.4 162.618,10.717 162.626,10.709 162.617,10.7 161.843,10.7 161.843,10.065 161.703,9.925
  region net +8V: 155.457,9.925 155.457,15.4 141.025,15.4 141.025,10.717 141.017,10.709 141.026,10.7 141.8,10.7 141.8,10.065 141.94,9.925
  region net NetC17_1: 182.843,9.925 182.843,15.195 164.868,15.195 164.868,10.717 164.86,10.709 164.869,10.7 165.643,10.7 165.643,10.065 165.783,9.925
  region net NetC26_2: 134,9.925 134,15.4 138.775,15.4 138.775,10.717 138.783,10.709 138.774,10.7 138,10.7 138,10.065 137.86,9.925
  region net NetC27_2: 134.643,33.725 134.643,37.1 140.118,37.1 140.118,34.517 140.126,34.509 140.117,34.5 139.343,34.5 139.343,33.865 139.203,33.725
  region net NetC31_2: 154.9,33.725 154.9,37.1 162.875,37.1 162.875,34.517 162.883,34.509 162.874,34.5 162.1,34.5 162.1,33.865 161.96,33.725
  region net NetC18_1: 147.843,33.725 147.843,37.1 142.368,37.1 142.368,34.517 142.36,34.509 142.369,34.5 143.143,34.5 143.143,33.865 143.283,33.725
  region net +8V: 142.8,9.925 142.8,13.2 141.025,13.2 141.025,10.717 141.017,10.709 141.026,10.7 141.8,10.7 141.8,10.065 141.94,9.925
Bottom Layer, Bottom:
  rectangle net NetC10_1: 195.134,73.8 197.884,80.5

## Silkscreen, mask and mechanical layers (free items; w line width, h text height)
Top Overlay, Top Silk:
  text "AMPLIFIER" at 170.7,103 h4
  text "SWITCHES" at 94.6,97.711 h4
  text "COMPARATOR" at 129.776,41.043 h4
  text "->" at 48.677,39.64 h2.5 r255
  text "->" at 51.068,39.024 h2.5 r300
  text "12~" at 213.7,37.731 h2.5
  text "12~" at 213.7,32.7 h2.5
  text "GNDV" at 213.7,27.731 h2.5
  text "-8V" at 162,27 h2.5
  text "+12V" at 138.543,26.8 h2.5
  text "8~" at 214,22.7 h2.5
  text "8~" at 213.9,17.411 h2.5
  text "+5.2V" at 137.389,3.3 h2.5
  text "+8V" at 161.843,3.2 h2.5
  text "POWER" at 175.7,1.8 h4
Mechanical 1, Top Assy:
  circle w0.2: c13,110 r1.5
Mechanical 5, Help:
  lines w0.2: 0,9 9,9 9,0 ; 0.5,115 0.5,106 9.5,106 ; 2.5,5 7.5,5 ; 2.5,110 7.5,110 ; 5,2.5 5,7.5 ; 5,107.5 5,112.5 ; 9.517,106 9.517,115 ; 15.5,-0.125 15.5,8.875 24.5,8.875 24.5,-0.125 ; 17.5,5 22.5,5 ; 20,2.5 20,7.5 ; 41,0 41,9 49,9 49,0 ; 91,115 91,106 99,106 99,115 ; 92.5,110 97.5,110 ; 95,107.5 95,112.5 ; 106,0 106,9 114,9 114,0 ; 106,115 106,106 114,106 114,115 ; 107.5,5 112.5,5 ; 107.5,110 112.5,110 ; 110,2.5 110,7.5 ; 110,107.5 110,112.5 ; 116,110 120,110 ; 118,108 118,112 ; 123,110 127,110 ; 125,108 125,112 ; 195.5,0 195.5,9 204.5,9 204.5,0 ; 197.5,5 202.5,5 ; 200,2.5 200,7.5 ; 210.5,0 210.5,9 219.5,9 219.5,0 ; 210.5,115 210.5,106 219.5,106 219.5,115 ; 212.5,5 217.5,5 ; 212.5,110 217.5,110 ; 215,2.5 215,7.5 ; 215,107.5 215,112.5 ; 11,110 15,110 11,110 ; 13,108 13,112 13,108 ; 42.5,5 47.5,5 42.5,5 ; 45,2.5 45,7.5 45,2.5

## Text inside footprints (layer, text, board x,y; h text height)
C4: Top Overlay, Top Silk "+" at 194.705,65 h2 r90
C17: Top Overlay, Top Silk "+" at 182.893,15.3 h2 r270
C18: Top Overlay, Top Silk "+" at 182.893,36.6 h2 r270
C28: Top Overlay, Top Silk "+" at 179.043,27.4 h2 r180
XP4: Top Overlay, Top Silk "1" at 205,18.06 h4 r90